# Altium PCB Volga-PCB.PcbDoc
Units mm, origin at the board's own origin, x right, y up, seen from the top; angles counter-clockwise.
Board outline 25 x 19 mm, 2 copper layers (Top Layer, Bottom Layer); 6 components, 6 nets, 33 pads, 1 vias.
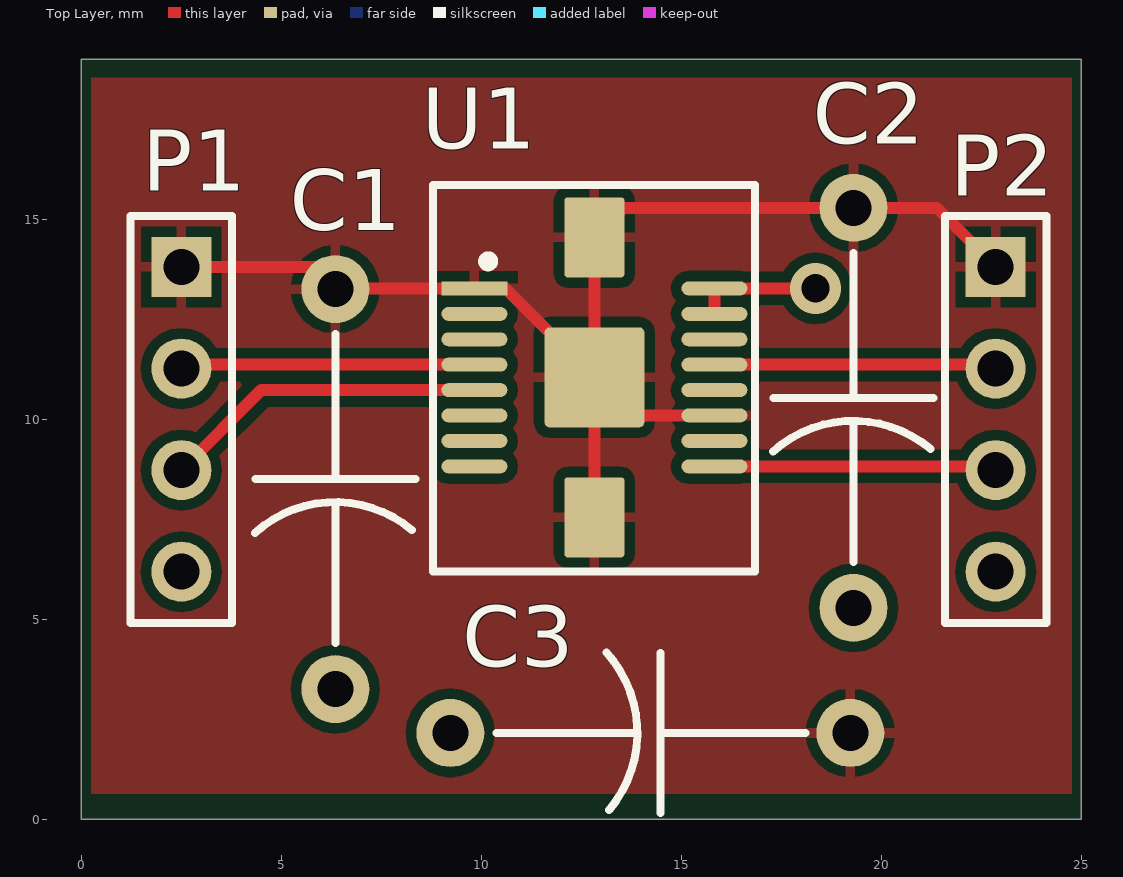
[diagram p0: Top Layer view]
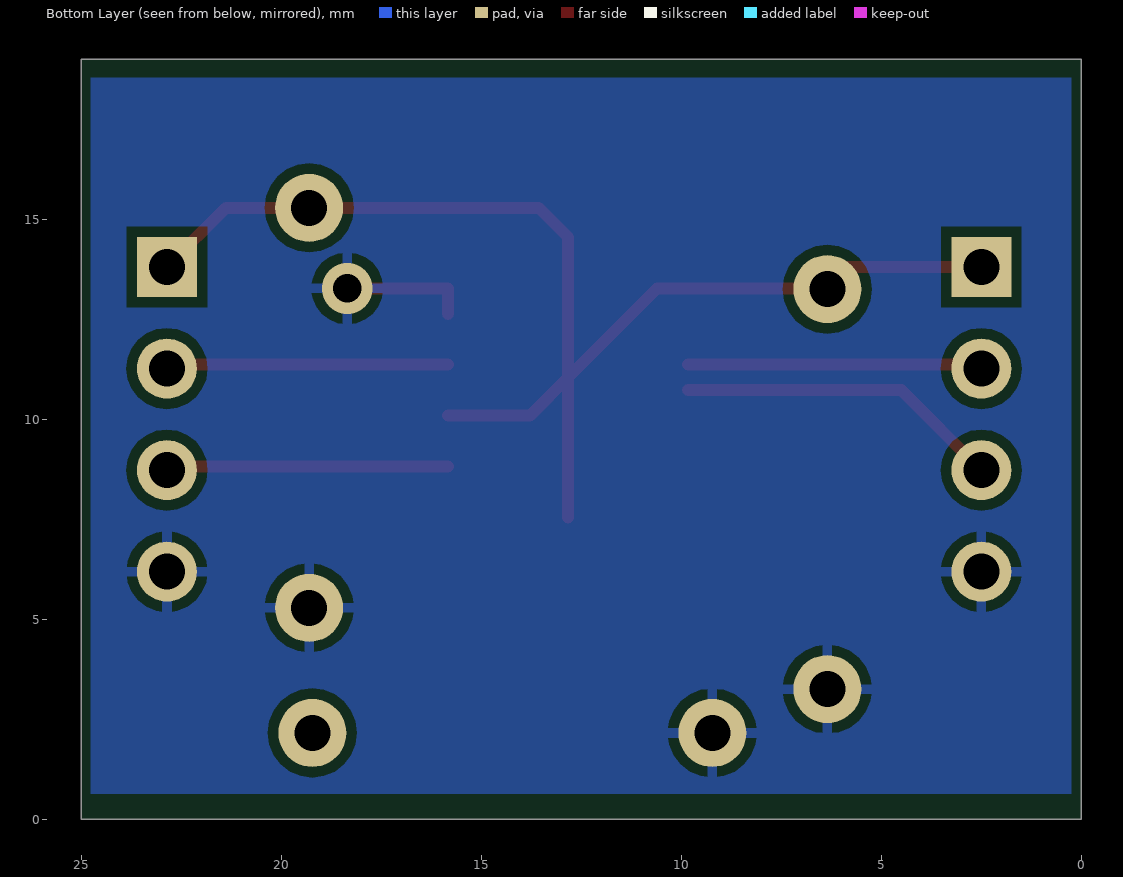
[diagram p1: Bottom Layer view, seen from below]

## Layer stack, top to bottom
Top Solder: solder mask 0.0102, Solder Resist, Dk 3.5
Top Layer: signal copper 0.0356
Dielectric 1: dielectric 0.32, FR-4, Dk 4.8
Bottom Layer: signal copper 0.0356
Bottom Solder: solder mask 0.0102, Solder Resist, Dk 3.5

## Board outline
0,0 0,19 25,19 25,0

## Design rules (kind name [scope] priority, off if disabled: settings)
Clearance Polygons [InPolygon] p1: gap=0.254
Clearance [All] p2: gap=0.15
MinimumSolderMaskSliver [All] p1: minsoldermaskwidth=0.1
PolygonConnect [All] p1: connectstyle=Relief reliefconductorwidth=0.254 reliefentries=4 polygonreliefangle="90 Angle" airgapwidth=0.254
RoomDefinition Volga-PCB [InComponentClass('Volga-PCB')] p1: confinementstyle=ConfineIn formatcopy=TRUE lockcomponents=FALSE outline -4.064,-6.096 37.592,-6.096 37.592,21.209 -4.064,21.209
RoutingVias [All] p1: holewidth=0.711 width=1.27 viastyle="Through Hole" minholewidth=0 minwidth=0 maxholewidth=0.711 maxwidth=1.27
SilkToSilkClearance [All] p1: silktosilkclearance=0
SilkToSolderMaskClearance [IsPad] p1: minsilkscreentomaskgap=0.1 clearancetoexposedcopper=TRUE
SolderMaskExpansion [All] p1: expansion=0.102
Width [All] p1: maxlimit=4 minlimit=0.254 preferedwidth=0.5
27 further rules are at their usual default settings.

## Components (designator, comment, footprint, x,y, rotation, side; value= is the part's Value field where it differs from the comment)
C1 "Capacitor-Dummy-THT" Dummy-10mm 6.35,8.255 r270 top
C2 "Capacitor-Dummy-THT" Dummy-10mm 19.304,10.287 r270 top
C3 "Capacitor-Dummy-THT" Dummy-10mm 14.224,2.159 r180 top
P1 "Plug_4_90_2.54" HDR1X4 2.5,10 r270 top
P2 "Plug_4_90_2.54" HDR1X4 22.86,10 r270 top
U1 "CHT-VOLGA" TDFP16 12.827,11.049 r0 top

## Footprints (in the part's own frame and the unit in brackets; to place one, negate y for a bottom-side part, rotate by r counter-clockwise, add the part's x,y. Pads: shape width x height; smd on the part's side, far side on the other; paste and mask are expansions set on the pad)
Dummy-10mm [mm] "Dummy-10mm"
  round 1.7 hole 0.9: 1(-5,0) 2(5,0)
  silkscreen extent -3.88,-2.01 3.85,2, body extent -5.34,-1.16 5.35,1.13, height 7.83
HDR1X4 [mm] "Connector; Header; 4 Position"
  rect 1.5x1.5 hole 0.9: 1(-3.81,0)
  round 1.5 hole 0.9: 2(-1.27,0) 3(1.27,0) 4(3.81,0)
  silkscreen extent -5.08,-1.27 5.09,1.27, body extent -5.08,-1.31 5.08,1.27, height 8.62
TDFP16 [mm] "TDFP16"
  rect 1.65x0.35 smd: 1(-3,2.225)
  oval 1.65x0.35 smd: 2(-3,1.587) 3(-3,0.953) 4(-3,0.318) 5(-3,-0.318) 6(-3,-0.953) 7(-3,-1.587) 8(-3,-2.225) 9(3,-2.225) 10(3,-1.587) 11(3,-0.953) 12(3,-0.318) 13(3,0.318) 14(3,0.953) 15(3,1.587) 16(3,2.225)
  rrect10% 2.5x2.5 smd: 17(0,0)
  rrect10% 1.5x2 smd: 18(0,3.5) 19(0,-3.5)
  silkscreen extent -4.03,-4.85 4.02,4.81, body extent -3.18,-3.74 3.32,3.76, height 1.15

## Part data
P1 P2: "Plug, 4-Pin"
U1: "Comparator, Hi-Temp, 25MHz"

## Via types
v1: diameter 1.27, hole 0.711, Top Layer to Bottom Layer, 1 vias

## Nets (pads, with @x,y where several pads share a name; then routed paths per layer and width w, separated by ;. In a path a pad name is that pad's centre, name@x,y a point inside that pad or via, vN(x,y) a via of type N, cw(c..) or ccw(c..) an arc to the next point about the centre after c; other vN are vias at no path point)
GND: C1.2 C2.2 C3.2 P1.4 P2.4 U1.15 U1.16 | length 3.2
  Top Layer w0.3: U1.15 U1.16 v1(18.354,13.274)
NetP1_2: P1.2 U1.4 | length 7.4
  Top Layer w0.3: P1.2 2.596,11.367 U1.4
NetP1_3: P1.3 U1.5 | length 8.2
  Top Layer w0.3: P1.3 4.501,10.731 U1.5
NetP2_2: P2.2 U1.13 | length 7.1
  Top Layer w0.3: U1.13 22.764,11.367 P2.2
NetP2_3: P2.3 U1.9 | length 7.1
  Top Layer w0.3: U1.9 22.766,8.824 P2.3
VCC: C1.1 C2.1 C3.1 P1.1 P2.1 U1.1 U1.11 U1.17 U1.18 U1.19 | length 32.8
  Top Layer w0.3: P1.1 5.833,13.81 6.369,13.274 U1.1 10.602,13.274 U1.17 ; U1.19 U1.17 ; U1.11 13.779,10.096 U1.17 ; P2.1 21.383,15.287 C2.1 13.565,15.287 U1.18 U1.17
pads on no net: U1.2 U1.3 U1.6 U1.7 U1.8 U1.10 U1.12 U1.14

## Polygon pours and split planes (outlines as drawn)
GND on Bottom Layer "GND-Bottom" (solid, pour order 0): 0.254,0.635 24.765,0.635 24.765,18.542 0.254,18.542
VCC on Top Layer "Vcc-Top" (solid, pour order 2): 0.254,0.635 24.765,0.635 24.765,18.542 0.254,18.542

## Silkscreen, mask and mechanical layers (free items; w line width, h text height)
outline:
  the board outline again, w0.1

## Dimensions
25,0 to 25,19 on Mechanical 16
25,0 to 0,0 on Mechanical 16